# Altium PCB RFID主控板-MFC522.PcbDoc
Units mil, origin at the board's own origin, x right, y up, seen from the top; angles counter-clockwise.
Board outline 2155 x 1755 mil, 2 copper layers (Top Layer, Bottom Layer); 62 components, 46 nets, 180 pads, 118 vias.
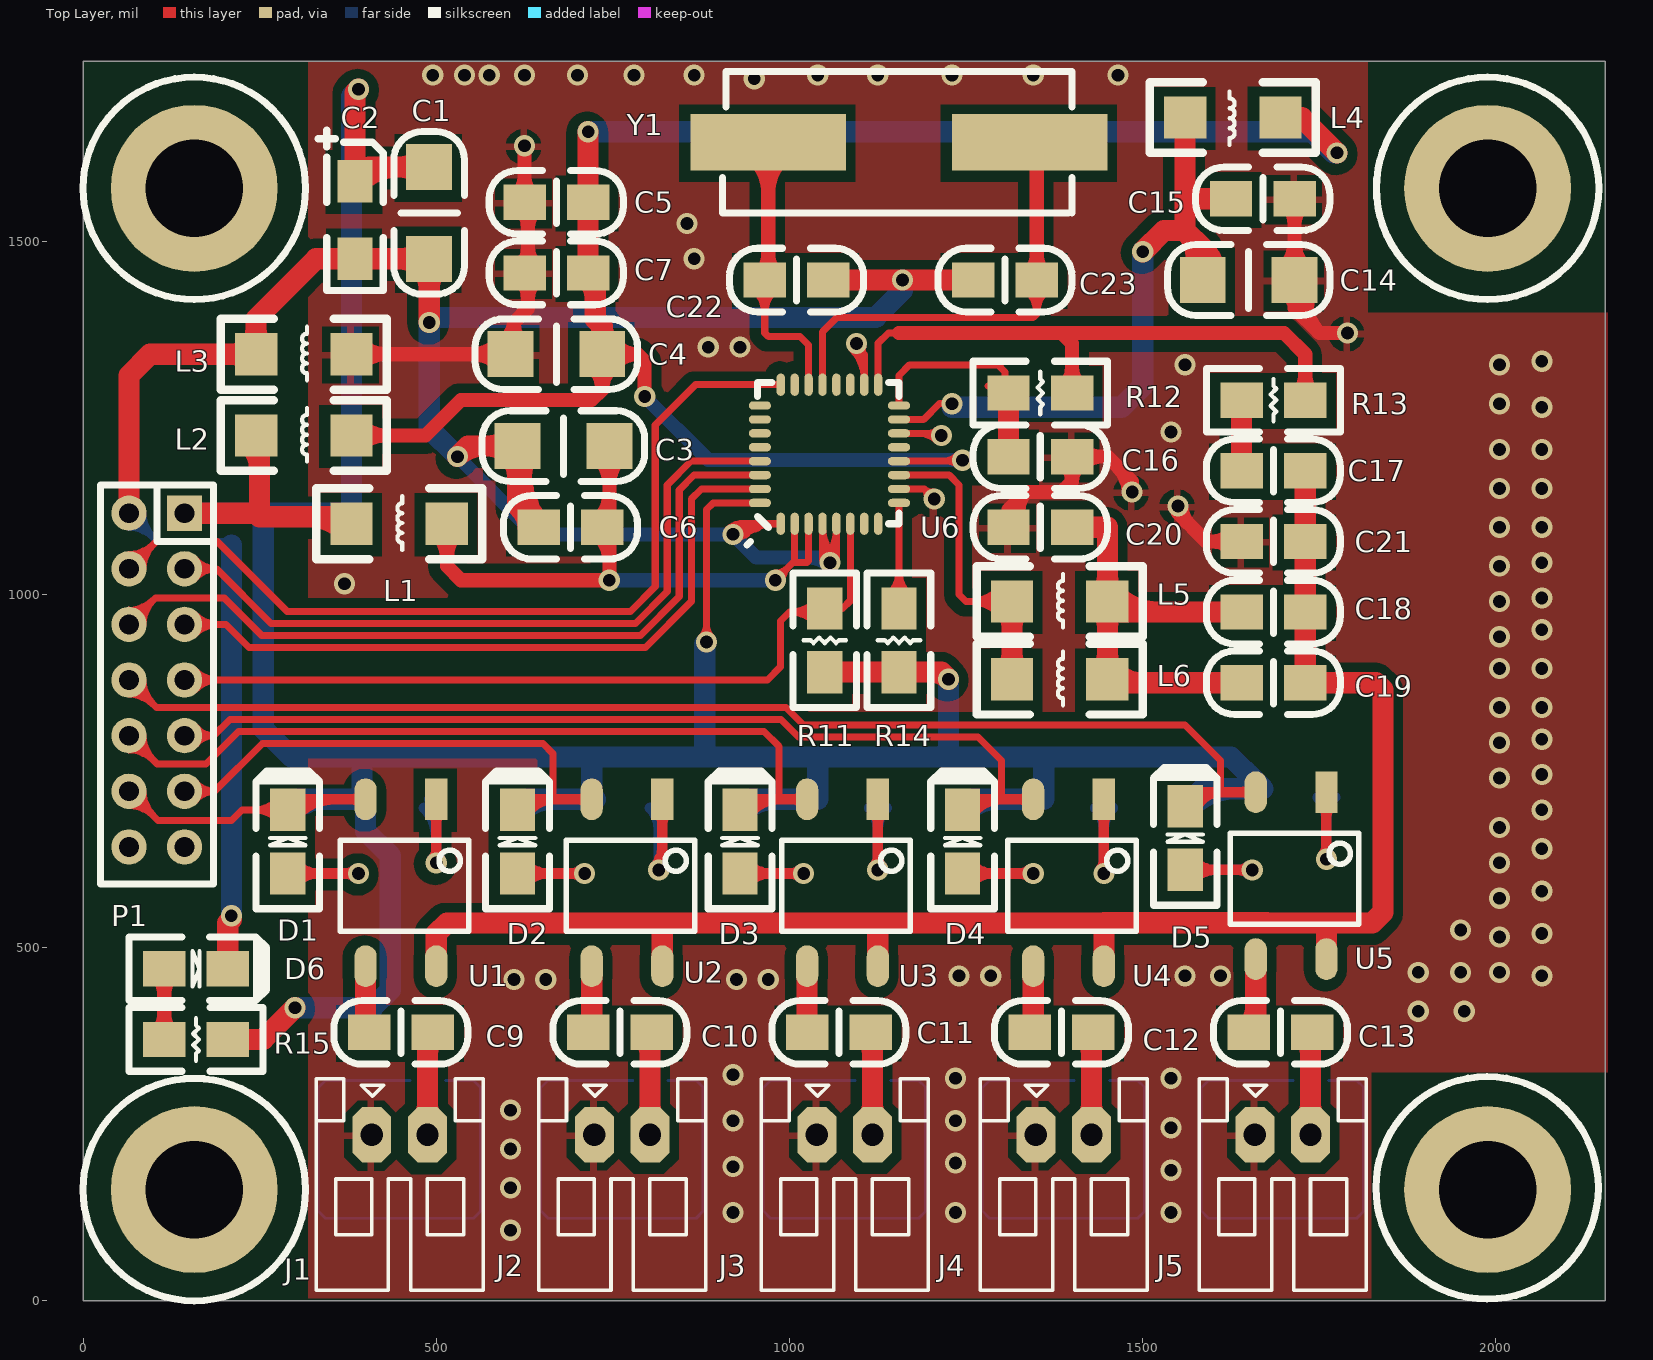
[diagram p0: Top Layer view]
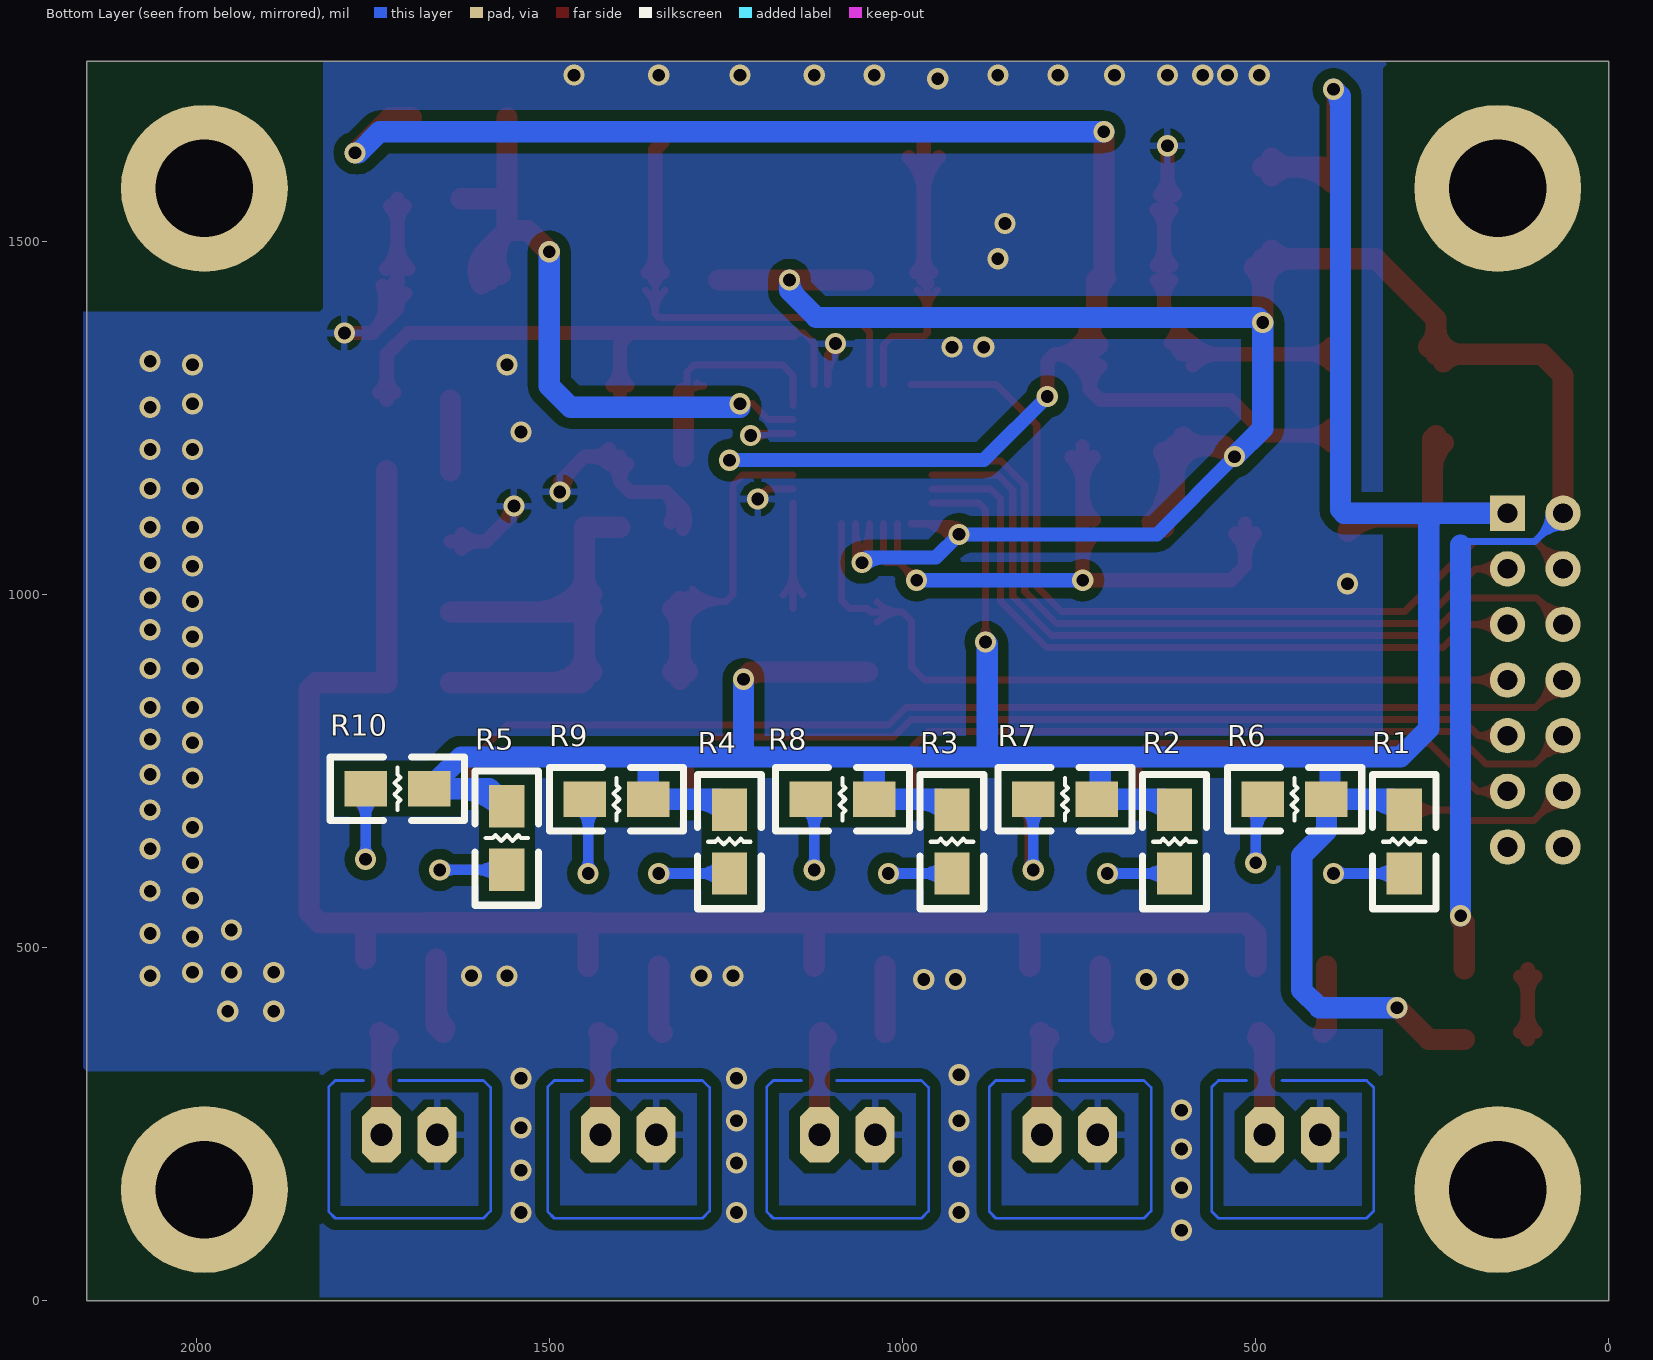
[diagram p1: Bottom Layer view, seen from below]
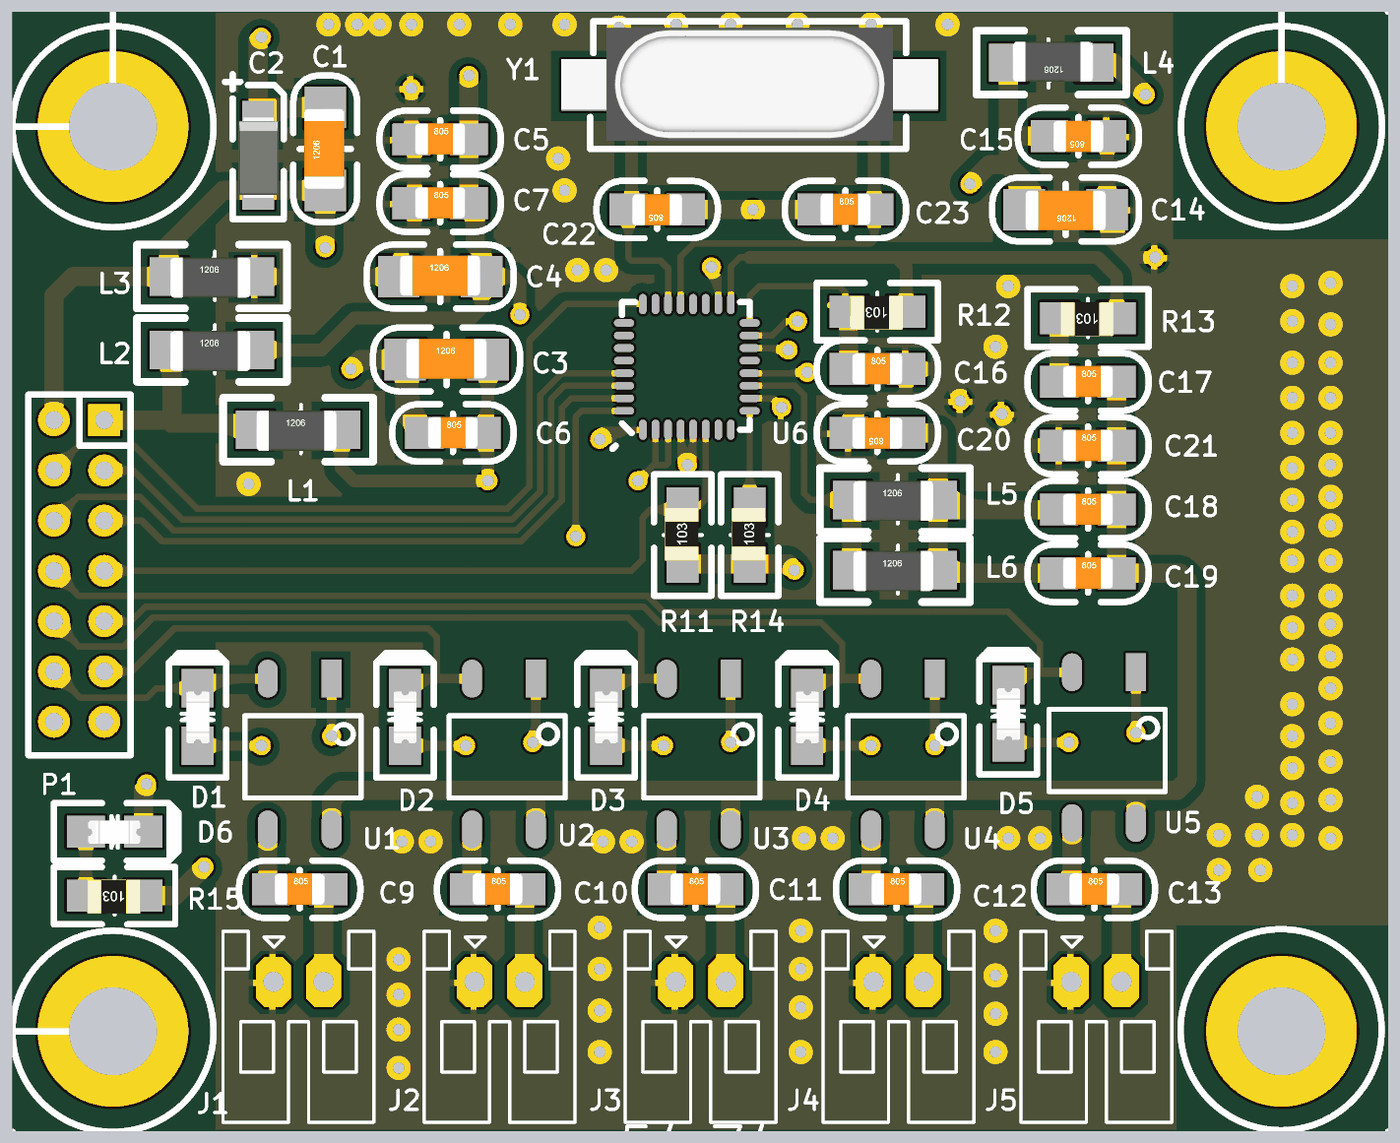
[diagram p2: 3D render of the assembled board from above, using the file's embedded part models]
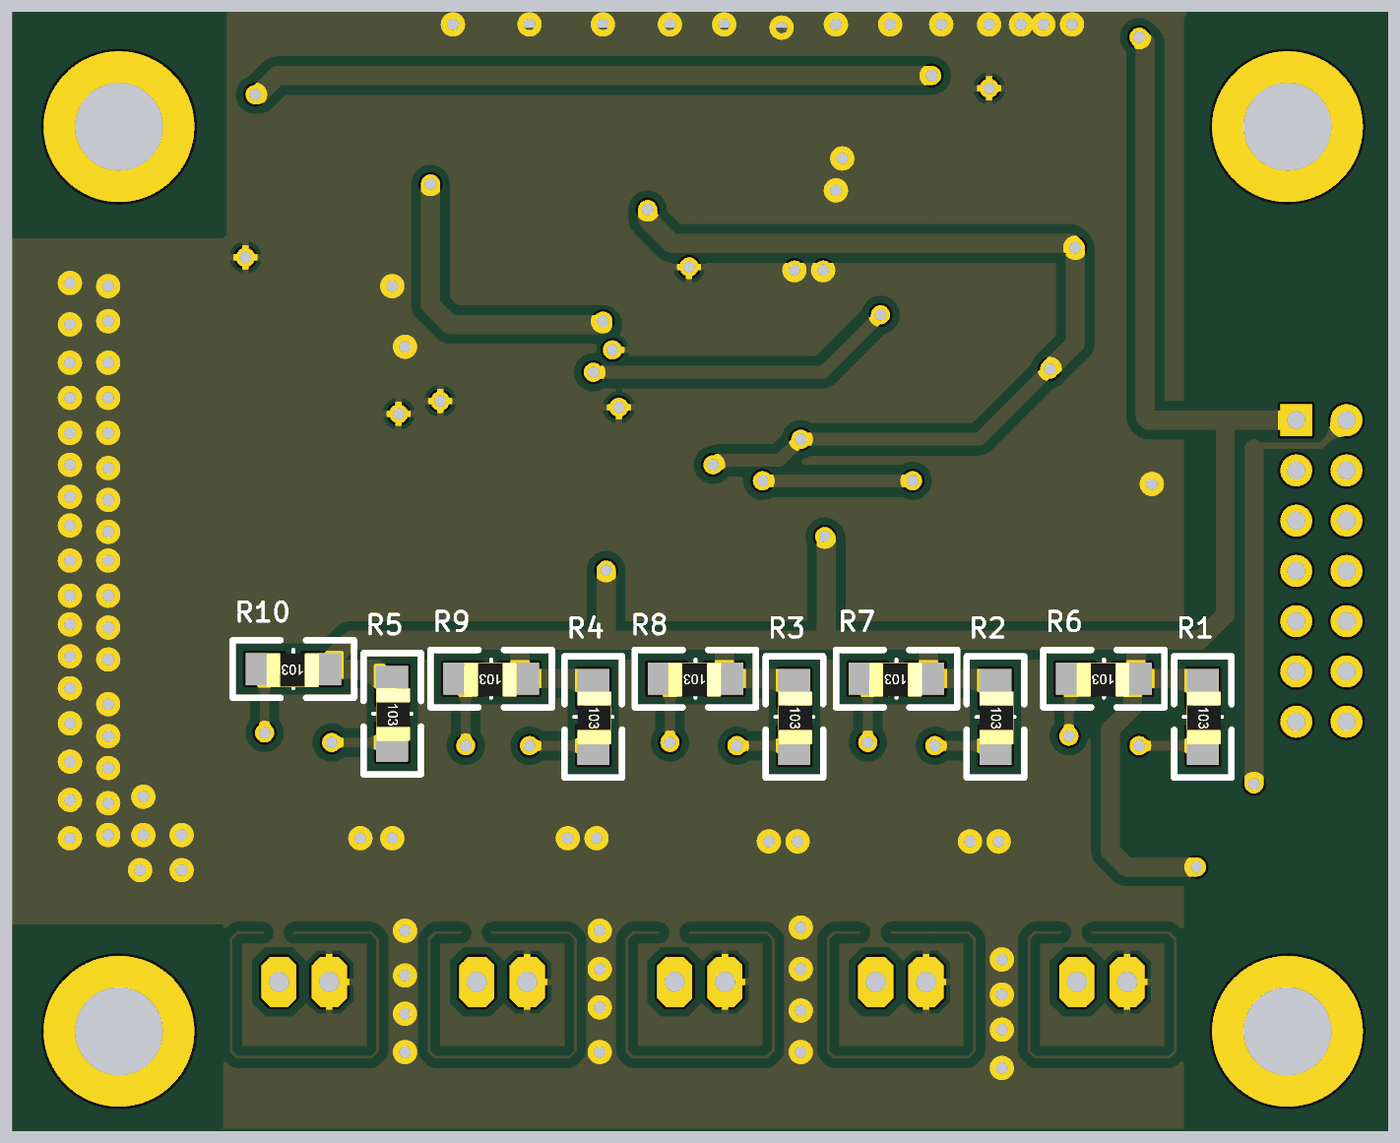
[diagram p3: 3D render of the assembled board from below, using the file's embedded part models]

## Layer stack, top to bottom
Top Layer: signal copper 1.4
Dielectric: dielectric 12.6, FR-4, Dk 4.8
Bottom Layer: signal copper 1.4

## Board outline
0,0 0,1755 2155,1755 2155,0 0,0

## Design rules (kind name [scope] priority, off if disabled: settings)
Clearance [All] p1: gap=7
HoleSize [All] p1 off: absolutevalues=TRUE maxlimit=100 minlimit=1 maxpercent=80.000 minpercent=20.000
MinimumSolderMaskSliver [All] p1: minsoldermaskwidth=7
PolygonConnect [All] p1: connectstyle=Relief reliefconductorwidth=10 reliefentries=4 polygonreliefangle="90 Angle" airgapwidth=10
RoutingVias [All] p1: holewidth=28 width=50 viastyle="Through Hole" minholewidth=28 minwidth=50 maxholewidth=28 maxwidth=50
SilkToSilkClearance [All] p1 off: silktosilkclearance=10
SilkToSolderMaskClearance [IsPad] p1 off: minsilkscreentomaskgap=7 clearancetoexposedcopper=TRUE
SolderMaskExpansion [All] p1: expansion=4
Width [All] p1: maxlimit=100 minlimit=1 preferedwidth=10
24 further rules are at their usual default settings.

## Components (designator, comment, footprint, x,y, rotation, side; value= is the part's Value field where it differs from the comment)
C1 "CC41-X7R-10V-4.7uF±10%" 1206C 490,1475 r90 top
C2 "CA45-16V-10uF±10%" 3216-A 385,1585 r270 top
C3 "CC41-X7R-10V-4.7uF±10%" 1206C 615,1210 r0 top
C4 "CC41-X7R-10V-4.7uF±10%" 1206C 605,1340 r0 top
C5 "CC41-X7R-50V-0.1uF±10%" 0805C 625,1555 r0 top
C6 "CC41-X7R-50V-0.1uF±10%" 0805C 645,1095 r0 top
C7 "CC41-NP0-50V-150pF±5%" 0805C 625,1455 r0 top
C9 "CC41-X7R-50V-68nF±10%" 0805C 405,380 r0 top
C10 "CC41-X7R-50V-68nF±10%" 0805C 715,380 r0 top
C11 "CC41-X7R-50V-68nF±10%" 0805C 1025,380 r0 top
C12 "CC41-X7R-50V-68nF±10%" 0805C 1340,380 r0 top
C13 "CC41-X7R-50V-68nF±10%" 0805C 1650,380 r0 top
C14 "CC41-X7R-10V-4.7uF±10%" 1206C 1715,1445 r180 top
C15 "CC41-X7R-50V-0.1uF±10%" 0805C 1715,1560 r180 top
C16 "CC41-X7R-50V-68nF±10%" 0805C 1310,1195 r0 top
C17 "CC41-X7R-50V-68nF±10%" 0805C 1640,1175 r0 top
C18 "CC41-NP0-50V-130pF±5%" 0805C 1640,975 r0 top
C19 "CC41-NP0-50V-130pF±5%" 0805C 1640,875 r0 top
C20 "CC41-NP0-50V-130pF±5%" 0805C 1400,1095 r180 top
C21 "CC41-NP0-50V-20pF±5%" 0805C 1640,1075 r0 top
C22 "CC41-NP0-50V-20pF±5%" 0805C 1055,1445 r180 top
C23 "CC41-NP0-50V-20pF±5%" 0805C 1260,1445 r0 top
D1 "17-21SYGC/S530-E2/TR8" 0805D 290,695 r270 top
D2 "17-21SYGC/S530-E2/TR8" 0805D 615,695 r270 top
D3 "17-21SYGC/S530-E2/TR8" 0805D 930,695 r270 top
D4 "17-21SYGC/S530-E2/TR8" 0805D 1245,695 r270 top
D5 "17-21SYGC/S530-E2/TR8" 0805D 1560,700 r270 top
D6 "17-21SYGC/S530-E2/TR8" 0805D 205,470 r180 top
J1 "A2001WR-2P" A2001WR-2P 330,15 r0 top
J2 "A2001WR-2P" A2001WR-2P 645,15 r0 top
J3 "A2001WR-2P" A2001WR-2P 960,15 r0 top
J4 "A2001WR-2P" A2001WR-2P 1270,15 r0 top
J5 "A2001WR-2P" A2001WR-2P 1580,15 r0 top
L1 "MLF3216A101KT000(TDK)-100uH" 1206L 380,1100 r0 top
L2 "HF50ACC321611(TDK)" 1206L 245,1225 r0 top
L3 "HF50ACC321611(TDK)" 1206L 245,1340 r0 top
L4 "MLF3216A101KT000(TDK)-100uH" 1206L 1695,1675 r180 top
L5 "LQM31PN1R0M00L(muRata)-1uH" 1206L 1315,990 r0 top
L6 "LQM31PN1R0M00L(muRata)-1uH" 1206L 1315,880 r0 top
P1 "Header 7X2H" IDC14-2.0-F 65,1115 r270 top
R1 "RS12-1/8W-1K±5%" 0805R 290,695 r270 bottom
R2 "RS12-1/8W-1K±5%" 0805R 615,695 r270 bottom
R3 "RS12-1/8W-1K±5%" 0805R 930,695 r270 bottom
R4 "RS12-1/8W-1K±5%" 0805R 1245,695 r270 bottom
R5 "RS12-1/8W-1K±5%" 0805R 1560,700 r270 bottom
R6 "RS12-1/8W-220Ω±5%" 0805R 400,710 r0 bottom
R7 "RS12-1/8W-220Ω±5%" 0805R 725,710 r0 bottom
R8 "RS12-1/8W-220Ω±5%" 0805R 1040,710 r0 bottom
R9 "RS12-1/8W-220Ω±5%" 0805R 1360,710 r0 bottom
R10 "RS12-1/8W-220Ω±5%" 0805R 1670,725 r0 bottom
R11 "RS12-1/8W-10KΩ±5%" 0805R 1050,890 r90 top
R12 "RS12-1/8W-2.7KΩ±1%" 0805R 1400,1285 r180 top
R13 "RS12-1/8W-820Ω±1%" 0805R 1730,1275 r180 top
R14 "RS12-1/8W-200Ω±1%" 0805R 1155,890 r90 top
R15 "RS12-1/8W-1K±5%" 0805R 205,370 r180 top
U1 "AQY221N2S(NAIS)" SOP-4 500,710 r270 top
U2 "AQY221N2S(NAIS)" SOP-4 820,710 r270 top locked
U3 "AQY221N2S(NAIS)" SOP-4 1125,710 r270 top
U4 "AQY221N2S(NAIS)" SOP-4 1445,710 r270 top
U5 "AQY221N2S(NAIS)" SOP-4 1760,720 r270 top
U6 "RC522" QFN-32 1155,1100 r90 top
Y1 "27.120MHz" HC-49/CMD 1340,1640 r180 top

## Footprints (in the part's own frame and the unit in brackets; to place one, negate y for a bottom-side part, rotate by r counter-clockwise, add the part's x,y. Pads: shape width x height; smd on the part's side, far side on the other; paste and mask are expansions set on the pad)
0805C [mil]
  rect 60x50 smd: 1(0,0) 2(90,0)
  silkscreen extent -50,-45 140,45, body extent 6,-24 84,25, height 31
0805D [mil]
  rect 60x50 smd: 1(90,0) 2(0,0)
  silkscreen extent -56,-45 140,46, body extent 5,-17 86,18, height 33
0805R [mil]
  rect 60x50 smd: 1(0,0) 2(90,0)
  silkscreen extent -50,-45 140,45, body extent 5,-25 88,28, height 24
1206C [mil]
  rect 65x65 smd: 1(0,0) 2(130,0)
  silkscreen extent -50,-50 180,50, body extent 2,-30 128,33, height 39
1206L [mil]
  rect 60x60 smd: 1(0,0) 2(135,0)
  silkscreen extent -50,-50 185,50, body extent 2,-33 128,30, height 39
3216-A [mil]
  rect 60x50 smd: 1(0,0) 2(110,0)
  silkscreen extent -72,-52 155,40, body extent -4,-31 122,32, height 63
A2001WR-2P [mm] "用于RFID天线的插座封装"
  oct 1.4x2 hole 0.8: 1(2,5.588) 2(4,5.588)
  Bottom Layer lines w0.1: 3.378,7.544 0.33,7.544 0.076,7.29 0.076,2.845 0.33,2.591 5.664,2.591 5.9,2.827 5.9,7.308 5.664,7.544 4.648,7.544
  silkscreen extent 0,0 6,7.6
HC-49/CMD [mil]
  rect 220x80 smd: 1(0,0) 2(370,0)
  silkscreen extent -60,-100 435,100, body extent -110,-90 480,87, height 99
IDC14-2.0-F [mm] "针型封装"
  rect 1.27x1.27 hole 0.711: 1(0,2)
  round 1.27 hole 0.711: 2(0,0) 3(2,2) 4(2,0) 5(4,2) 6(4,0) 7(6,2) 8(6,0) 9(8,2) 10(8,0) 11(10,2) 12(10,0) 13(12,2) 14(12,0)
  silkscreen extent -1.02,-1.02 13.33,3.05
QFN-32 [mm]
  oval 0.8x0.3 smd: 1(0,4.25) 2(0,3.75) 3(0,3.25) 4(0,2.75) 5(0,2.25) 6(0,1.75) 7(0,1.25) 8(0,0.75) 17(5,0.75) 18(5,1.25) 19(5,1.75) 20(5,2.25) 21(5,2.75) 22(5,3.25) 23(5,3.75) 24(5,4.25)
  oval 0.3x0.8 smd: 9(0.75,0) 10(1.25,0) 11(1.75,0) 12(2.25,0) 13(2.75,0) 14(3.25,0) 15(3.75,0) 16(4.25,0) 25(4.25,5) 26(3.75,5) 27(3.25,5) 28(2.75,5) 29(2.25,5) 30(1.75,5) 31(1.25,5) 32(0.75,5)
  silkscreen extent -0.76,0 5.08,5.46
SOP-4 [mm] "AQY221N2S"
  rect 1.5x0.8 smd: 1(0,0)
  oval 1.5x0.8 smd: 2(0,-2.54) 3(6,-2.54) 4(6,0)
  silkscreen extent 1.47,-3.45 4.75,1.17

## Part data
C1 C3 C4 C5 C6 C7 C9 C10 C11 C12 C13 C14 C15 C16 C17 C18 C19 C20 C21 C22 C23: library part CAP, "Capacitor"
C2: library part "Cap Pol1", "Polarized Capacitor (Radial)"
D1 D2 D3 D4 D5 D6: library part Diode, "Default Diode"
J1 J2 J3 J4 J5: library part CON2
L1 L2 L3 L4 L5 L6: library part Inductor, "Inductor"
P1: "Header, 7-Pin, Dual row, Right Angle"
R1 R2 R3 R4 R5 R6 R7 R8 R9 R10 R11 R12 R13 R14 R15: library part Res3, "Resistor"
U1 U2 U3 U4 U5: library part OpticalCoupler, "OpticalCoupler"
Y1: library part XTAL, "Crystal Oscillator"

## Free pads (board coordinates)
  round 236.22 hole 137.8: 0(157.48,157.48) 0(157.48,1574.8) 0(1988.19,157.48) 0(1988.19,1574.8)

## Via types
v1: diameter 30, hole 18, Top Layer to Bottom Layer, 118 vias

## Nets (pads, with @x,y where several pads share a name; then routed paths per layer and width w, separated by ;. In a path a pad name is that pad's centre, name@x,y a point inside that pad or via, vN(x,y) a via of type N, cw(c..) or ccw(c..) an arc to the next point about the centre after c; other vN are vias at no path point)
3.3VIN: C1.2 C2.1 L1.1 L2.1 P1.1 R1.1 R2.1 R3.1 R4.1 R5.1 R6.1 R7.1 R8.1 R9.1 R10.1 R11.1 R14.1 R15.1 U6.32 | length 6110.1
  Top Layer w10: v1(882.53,932.53) 882.53,1120 892.06,1129.53 U6.32 ; 882.53,956.67 cw(c858.39,956.67) 875.46,939.6 ccw(c858.39,956.67) 882.53,956.67 ; 882.53,956.67 ccw(c906.67,956.67) 889.6,939.6 cw(c906.67,956.67) 882.53,956.67
  Top Layer w30: P1.1 245,1115 250,1110 ; R15.1 255,370 v1(300,415) ; L2.1 250,1220 250,1110 ; 319.64,1110 cw(c319.64,1039.64) L1.1@369.39,1089.39 ; L1.1@370,1110 250,1110 ; v1(390,1715) 385,1710 C2.1 405,1605 C1.2 ; C2.1@392.07,1582.93 cw(c445.36,1529.64) 445.36,1605 ; R11.1 R14.1 1215,890 v1(1225,880) ccw(c1200.86,855.86) 1200.86,890 ; 447.75,1605 cw(c447.75,1562.75) 477.63,1592.63 ccw(c447.75,1562.75) 447.75,1605 ; 447.75,1605 ccw(c447.75,1647.25) 477.63,1617.37 cw(c447.75,1647.25) 447.75,1605 ; L2.1@234.39,1214.39 cw(c196.72,1176.72) 250,1176.72 ccw(c196.72,1176.72) L2.1@234.39,1214.39
  Bottom Layer w30: P1.1 245,1115 ; R1.1@296.66,707.46 ccw(c309.06,721.35) 318.37,705.23 ; v1(300,415) 410,415 435,440 435,630 400,665 R6.1 ; R1.1@305,710 R6.1 ; 380,1690.86 cw(c414.14,1690.86) v1(390,1715) 380,1705 380,1120 375,1115 245,1115 ; R2.1 630,710 R7.1 720,715 720,770 ; R2.1@622.07,692.93 cw(c663.28,651.72) 663.28,710 ; v1(882.53,932.53) 880,930 880,770 ; R3.1 945,710 R8.1 1040,770 ; R3.1@937.07,692.93 cw(c978.28,651.72) 978.28,710 ; v1(1225,880) 1225,780 1215,770 ; R4.1 1260,710 R9.1 1360,770 ; R4.1@1252.07,692.93 cw(c1293.28,651.72) 1293.28,710 ; R5.1 1585,725 R10.1 1625,770 1360,770 ; R5.1@1567.07,697.93 cw(c1632.43,632.57) 1632.43,725 ; 245,1115 255,1105 255,810 295,770 395,770 ; 395,770 720,770 ; 395,770 395,715 R6.1 ; 720,770 880,770 ; 880,770 1040,770 ; 1040,770 1215,770 ; 1215,770 1360,770 ; R1.1@297.07,692.93 cw(c338.28,651.72) 338.28,710 ccw(c338.28,651.72) R1.1@297.07,692.93 ; 1644.39,750.61 cw(c1618.79,725) 1655,725 ccw(c1618.79,725) 1644.39,750.61
/RST: P1.7 R11.2 U6.6 | length 1363.4
  Top Layer w10: P1.7 968.78,878.78 987.5,897.5 987.5,962.5 1000,975 1045,975 R11.2 1075,980 1086.1,991.1 U6.6 ; P1.7@157.88,864.64 cw(c192.02,830.5) 192.02,878.78 cw(c192.02,927.06) P1.7@157.88,892.92 ; 1001.72,975 cw(c1001.72,926.72) 1035.86,960.86 ccw(c1001.72,926.72) 1001.72,975 ; 1001.72,975 ccw(c1001.72,1023.28) 1035.86,989.14 cw(c1001.72,1023.28) 1001.72,975
AGND: C4.1 C5.1 C7.1 C14.1 C15.1 C16.2 C20.2 C21.1 J1.1 J2.1 J3.1 J4.1 J5.1 L3.2 U6.10 U6.14 U6.18 | length 3753.8
  Top Layer w10: v1@1087.93,1347.93 cw(c1044.81,1304.81) U6.18@1105.79,1304.81 ; v1@1095,1345 cw(c1095,1332.93) 1103.54,1341.46 ; v1(1095,1355) cw(c1068.96,1328.96) 1105.79,1328.96 ; v1@1100,1345 1105.79,1339.21 ; v1@1103.95,1350.53 ccw(c1112.72,1346.15) 1105.79,1339.21 ; U6.18 1105.79,1339.21 ; U6.10 1190.79,1149.21 ; U6.14 1202.95,1227.95 v1@1205,1230 ; 1183.73,1227.95 cw(c1183.73,1193.73) v1@1207.93,1217.93 ; v1@1195.09,1136.38 ccw(c1180.04,1138.47) 1190.79,1149.21 ; 1197.99,1227.95 ccw(c1197.99,1242.01) v1@1207.93,1232.07 ; v1@1203.62,1144.91 cw(c1201.53,1159.96) 1190.79,1149.21 ; v1(1205,1135) 1190.79,1149.21
  Top Layer w20: L3.2 C4.1 610,1345 610,1385 ; v1(625,1635) C5.1 630,1550 630,1405 610,1385 ; C20.2 1310,1120 1335,1145 ; 1474.19,1166.67 ccw(c1501.78,1174.06) v1@1487.5,1149.33 ; v1(1485,1145) 1485,1160 1450,1195 C16.2 1400,1160 ; v1@1547.5,1120.67 cw(c1533.22,1095.94) 1560.81,1103.33 ; v1(1550,1125) 1550,1115 1590,1075 C21.1 ; C14.1@1714.03,1442.7 cw(c1701.82,1413.75) 1733.04,1410.31 ; C15.1 C14.1 1715,1405 ; v1(1790,1370) 1750,1370 ; 428.28,1340 cw(c428.28,1388.28) 394.14,1354.14 ccw(c428.28,1388.28) 428.28,1340 ; 428.28,1340 ccw(c428.28,1291.72) 394.14,1325.86 cw(c428.28,1291.72) 428.28,1340 ; 550.68,1340 cw(c550.68,1285.68) 589.09,1324.09 ccw(c550.68,1285.68) 550.68,1340 ; 550.68,1340 ccw(c550.68,1394.32) 589.09,1355.91 cw(c550.68,1394.32) 550.68,1340 ; 610,1385 cw(c581.93,1385) 594.74,1360.02 ccw(c581.93,1385) 610,1385 ; 625,1591.21 cw(c588.79,1591.21) 614.39,1565.61 ccw(c588.79,1591.21) 625,1591.21 ; 625,1591.21 ccw(c661.21,1591.21) 635.61,1565.61 cw(c661.21,1591.21) 625,1591.21 ; 630,1418.79 cw(c666.21,1418.79) 640.61,1444.39 ccw(c666.21,1418.79) 630,1418.79 ; 630,1418.79 ccw(c593.79,1418.79) 619.39,1444.39 cw(c593.79,1418.79) 630,1418.79 ; 630,1491.21 cw(c593.79,1491.21) 619.39,1465.61 ccw(c593.79,1491.21) 630,1491.21 ; 630,1491.21 ccw(c666.21,1491.21) 640.61,1465.61 cw(c666.21,1491.21) 630,1491.21 ; 630,1518.79 cw(c666.21,1518.79) 640.61,1544.39 ccw(c666.21,1518.79) 630,1518.79 ; 630,1518.79 ccw(c593.79,1518.79) 619.39,1544.39 cw(c593.79,1518.79) 630,1518.79 ; 1335,1145 ccw(c1361.11,1118.88) 1328.32,1101.9 cw(c1361.11,1118.88) 1335,1145 ; 1335,1145 1385,1145 1400,1160 ; 1400,1160 cw(c1433.33,1160) 1410.34,1184.14 ccw(c1433.33,1160) 1400,1160 ; 1400,1160 ccw(c1366.67,1160) 1389.66,1184.14 cw(c1366.67,1160) 1400,1160 ; 1441.21,1195 cw(c1441.21,1231.21) 1415.61,1205.61 ccw(c1441.21,1231.21) 1441.21,1195 ; 1441.21,1195 ccw(c1441.21,1158.79) 1415.61,1184.39 cw(c1441.21,1158.79) 1441.21,1195 ; 1598.79,1075 cw(c1598.79,1038.79) 1624.39,1064.39 ccw(c1598.79,1038.79) 1598.79,1075 ; 1598.79,1075 ccw(c1598.79,1111.21) 1624.39,1085.61 cw(c1598.79,1111.21) 1598.79,1075 ; 1715,1405 cw(c1739.3,1405) 1726.68,1425.77 ccw(c1739.3,1405) 1715,1405 ; 1715,1405 ccw(c1690.7,1405) 1703.32,1425.77 cw(c1690.7,1405) 1715,1405 ; 1715,1405 1750,1370 ; 1715,1499.32 cw(c1660.68,1499.32) 1699.09,1460.91 ccw(c1660.68,1499.32) 1715,1499.32 ; 1715,1499.32 ccw(c1769.32,1499.32) 1730.91,1460.91 cw(c1769.32,1499.32) 1715,1499.32 ; 1715,1523.79 cw(c1751.21,1523.79) 1725.61,1549.39 ccw(c1751.21,1523.79) 1715,1523.79 ; 1715,1523.79 ccw(c1678.79,1523.79) 1704.39,1549.39 cw(c1678.79,1523.79) 1715,1523.79 ; 1750,1370 cw(c1794.16,1414.16) 1735.97,1436.83 ccw(c1794.16,1414.16) 1750,1370 ; 610,1382.25 ccw(c647.25,1382.25) 620.91,1355.91 cw(c647.25,1382.25) 610,1382.25 ; C20.2@1310.56,1092.7 cw(c1335.65,1105.69) 1315.67,1125.67 ccw(c1335.65,1105.69) C20.2@1310.56,1092.7 ; 1465.86,1179.14 cw(c1431.72,1145) 1480,1145 ccw(c1431.72,1145) 1465.86,1179.14 ; v1@1555,1125 ccw(c1591.21,1125) 1565.61,1099.39 cw(c1591.21,1125) v1@1555,1125 ; C14.1@1717.33,1444.09 ccw(c1762.98,1426.31) 1728.34,1391.66 cw(c1762.98,1426.31) C14.1@1717.33,1444.09
  other v1: 605,100 920,125 1235,125 1540,125 605,160 1540,185 920,190 1235,195 605,215 1540,245 920,255 1235,255 605,270 1235,315 1540,315 920,320 1890,410 1955,410 610,455 655,455 925,455 970,455 1240,460 1285,460 1560,460 1610,460 2065,460 1890,465 1950,465 2005,465 2005,515 2065,520 1950,525 2005,570 2065,580 2005,620 2065,640 2005,670 2065,695 2005,740 2065,745 2005,790 2065,795 2005,840 2065,840 2005,895 2065,895 2005,940 2065,950 2005,990 2065,995 370,1015 2005,1040 2065,1045 2005,1095 2065,1095 2005,1150 2065,1150 2005,1205 2065,1205 1215,1225 1540,1230 2065,1265 2005,1270 1560,1325 2005,1325 2065,1330 885,1350 930,1350 865,1475 855,1525 950,1730 495,1735 540,1735 575,1735 625,1735 700,1735 780,1735 865,1735 1040,1735 1125,1735 1230,1735 1345,1735 1465,1735
AVDD: C14.2 C15.2 L4.2 U6.15 | length 1185
  Top Layer w10: U6.15 1190,1247.64 1212.36,1270 v1(1230,1270)
  Top Layer w30: v1(1500,1485) 1530,1515 1560,1515 ; L4.2 1560,1560 ; C14.2@1569.49,1453.1 ccw(c1522.59,1477.59) 1560,1515 ; C14.2 1585,1490 1560,1515 ; 1588.89,1486.11 cw(c1560.55,1457.77) C14.2@1596.08,1439.21 ; C15.2 1560,1560 ; 1560,1515 1560,1560 ; 1585,1487.25 cw(c1542.75,1487.25) 1572.63,1457.37 ccw(c1542.75,1487.25) 1585,1487.25 ; 1585,1487.25 ccw(c1627.25,1487.25) 1597.37,1457.37 cw(c1627.25,1487.25) 1585,1487.25
  Bottom Layer w30: v1@1230,1265 1470,1265 1500,1295 v1(1500,1485)
DVDD: C3.2 C6.2 L1.2 U6.2 U6.3 | length 1452.9
  Top Layer w10: 992.6,1033.38 ccw(c997.12,1016.49) v1(980,1020) ; 993.38,1032.6 cw(c976.49,1037.12) v1(980,1020) ; U6.2 1007.36,1047.36 1005,1045 ; U6.3 1027.05,1047.05 1025,1045 1005,1045 ; v1(980,1020) 1005,1045 ; 997.07,1037.07 cw(c980,1054.14) 980,1030 ccw(c980,1054.14) 997.07,1037.07 ; 997.07,1037.07 ccw(c1014.14,1020) 990,1020 cw(c1014.14,1020) 997.07,1037.07
  Top Layer w20: L1.2 515,1040 535,1020 v1(745,1020) C3.2 ; C6.2@729.39,1084.39 cw(c691.72,1046.72) 745,1046.72 ; 515,1051.72 cw(c563.28,1051.72) 529.14,1085.86 ccw(c563.28,1051.72) 515,1051.72 ; 515,1051.72 ccw(c466.72,1051.72) 500.86,1085.86 cw(c466.72,1051.72) 515,1051.72 ; 745,1155.68 cw(c799.32,1155.68) 760.91,1194.09 ccw(c799.32,1155.68) 745,1155.68 ; 745,1155.68 ccw(c690.68,1155.68) 729.09,1194.09 cw(c690.68,1155.68) 745,1155.68 ; C6.2@729.39,1105.61 ccw(c691.72,1143.28) 745,1143.28 cw(c691.72,1143.28) C6.2@729.39,1105.61
  Bottom Layer w20: v1(745,1020) v1(980,1020)
G1: D1.2 P1.12 U1.2 | length 899.4
  Top Layer w10: 90.2,694.55 cw(c99.24,728.31) P1.12 ; 91.75,696.1 ccw(c57.99,687.05) P1.12 ; D1.2 225,695 210,680 106.3,680 P1.12 ; 99.14,687.16 cw(c133.28,721.3) 85,721.3 ccw(c133.28,721.3) 99.14,687.16 ; 99.14,687.16 ccw(c65,653.01) 65,701.3 cw(c65,653.01) 99.14,687.16 ; 241.72,695 cw(c241.72,646.72) 275.86,680.86 ccw(c241.72,646.72) 241.72,695 ; 241.72,695 ccw(c241.72,743.28) 275.86,709.14 cw(c241.72,743.28) 241.72,695
  Top Layer w15: D1.2 305,710 U1.2 ; D1.2@291.77,698.23 cw(c320.18,669.82) 320.18,710 ; D1.2@302.37,687.63 cw(c356.39,633.61) 356.39,710 ; 380.09,710 cw(c380.09,690.09) 394.17,704.17 ccw(c380.09,690.09) 380.09,710 ; 380.09,710 ccw(c380.09,729.91) 394.17,715.83 cw(c380.09,729.91) 380.09,710
G2: D2.2 P1.11 U2.2 | length 1001.7
  Top Layer w10: P1.11 186.3,721.3 ; 665,710 665,775 651,789 254,789 186.3,721.3 ; 186.3,721.3 cw(c186.3,756.58) 159.14,734.06 ccw(c186.3,756.58) 186.3,721.3 ; 186.3,721.3 ccw(c186.3,686.02) 159.14,708.54 cw(c186.3,686.02) 186.3,721.3
  Top Layer w15: D2.2 630,710 665,710 ; U2.2 665,710 ; 665,710 ccw(c665,668.3) 629.78,690.63 cw(c665,668.3) 665,710 ; 700.09,710 cw(c700.09,690.09) 714.17,704.17 ccw(c700.09,690.09) 700.09,710 ; 700.09,710 ccw(c700.09,729.91) 714.17,715.83 cw(c700.09,729.91) 700.09,710
G3: D3.2 P1.10 U3.2 | length 1580.5
  Top Layer w10: 90.2,773.29 cw(c99.24,807.05) P1.10 ; 91.75,774.84 ccw(c57.99,765.79) P1.10 ; D3.2 D3.2@945,710 ; 985,710 985,785 964,806 220,806 174,760 105.04,760 P1.10 ; 99.14,765.9 cw(c133.28,800.04) 85,800.04 ccw(c133.28,800.04) 99.14,765.9 ; 99.14,765.9 ccw(c65,731.76) 65,780.04 cw(c65,731.76) 99.14,765.9
  Top Layer w15: D3.2@945,710 985,710 ; U3.2 985,710 ; 985,710 ccw(c985,658.75) 944,689.5 cw(c985,658.75) 985,710 ; 1005.09,710 cw(c1005.09,690.09) 1019.17,704.17 ccw(c1005.09,690.09) 1005.09,710 ; 1005.09,710 ccw(c1005.09,729.91) 1019.17,715.83 cw(c1005.09,729.91) 1005.09,710 ; D3.2@932,698.5 cw(c955,681.25) 955,710 ccw(c955,681.25) D3.2@932,698.5
G4: D4.2 P1.9 U4.2 | length 1620.8
  Top Layer w10: P1.9 185.04,800.04 ; P1.9@159.43,787.64 cw(c185.04,767.4) 185.04,800.04 ; P1.9@159.43,812.44 ccw(c185.04,832.68) 185.04,800.04 ; D4.2 D4.2@1260,710 ; 1300,710 1300,765 1267,798 1012.96,798 987.96,823 208,823 185.04,800.04
  Top Layer w15: D4.2@1260,710 1300,710 ; U4.2 1300,710 ; 1300,710 ccw(c1300,658.75) 1259,689.5 cw(c1300,658.75) 1300,710 ; 1325.09,710 cw(c1325.09,690.09) 1339.17,704.17 ccw(c1325.09,690.09) 1325.09,710 ; 1325.09,710 ccw(c1325.09,729.91) 1339.17,715.83 cw(c1325.09,729.91) 1325.09,710 ; D4.2@1247,698.5 cw(c1270,681.25) 1270,710 ccw(c1270,681.25) D4.2@1247,698.5
G5: D5.2 P1.8 U5.2 | length 2185
  Top Layer w10: 90.2,852.03 cw(c99.24,885.79) P1.8 ; 91.75,853.58 ccw(c57.99,844.53) P1.8 ; D5.2 D5.2@1580,720 ; 1610,720 1610,765 1560,815 1020,815 995,840 103.78,840 P1.8 ; 99.14,844.64 cw(c133.28,878.78) 85,878.78 ccw(c133.28,878.78) 99.14,844.64 ; 99.14,844.64 ccw(c65,810.5) 65,858.78 cw(c65,810.5) 99.14,844.64
  Top Layer w15: D5.2@1580,720 1610,720 ; U5.2 1610,720 ; 1610,720 ccw(c1610,682.79) 1575.99,697.9 cw(c1610,682.79) 1610,720 ; 1640.09,720 cw(c1640.09,700.09) 1654.17,714.17 ccw(c1640.09,700.09) 1640.09,720 ; 1640.09,720 ccw(c1640.09,739.91) 1654.17,725.83 cw(c1640.09,739.91) 1640.09,720 ; D5.2@1562.28,703.99 cw(c1586.92,693.04) 1586.92,720 ccw(c1586.92,693.04) D5.2@1562.28,703.99
GND: C1.1 C2.2 C3.1 C6.1 C22.1 C23.1 D6.2 L3.1 P1.2 U6.1 U6.4 U6.5 | length 5729.7
  Top Layer w10: v1@922.59,1094.66 ccw(c928.84,1117.98) 940.91,1097.07 ccw(c952.98,1076.16) v1@929.66,1082.41 ; v1@924.58,1093.89 ccw(c939.61,1123.07) 956.02,1094.64 ; v1@925,1095 930,1100 ; 940.15,1085.48 cw(c929.64,1103.7) v1(920,1085) ; U6.1 930,1100 ; U6.4 1047,1099.73 1047,1048 1050,1045 v1(1057.5,1045) ; 1047,1070.35 ccw(c1082.85,1070.35) v1(1057.5,1045) ; U6.4@1047,1094.49 ccw(c1106.99,1094.49) v1@1064.57,1052.07 ; v1@1050.43,1052.07 ccw(c1011.83,1090.67) U6.5@1066.42,1090.67 ; 1066.42,1066.53 cw(c1035.97,1066.53) v1(1057.5,1045) ; U6.5 1066.42,1046.42 1065,1045 v1(1057.5,1045) ; v1(920,1085) cw(c956.21,1048.79) 956.21,1100 ccw(c956.21,1048.79) v1(920,1085) ; 930,1100 ccw(c935.88,1094.12) 928.67,1089.98 cw(c935.88,1094.12) 930,1100 ; v1@912.93,1092.07 cw(c932.07,1072.93) 932.07,1100 ccw(c932.07,1072.93) v1@912.93,1092.07 ; v1@920,1095 ccw(c920,1107.07) 928.54,1098.54 cw(c920,1107.07) v1@920,1095 ; v1@927.07,1077.93 cw(c980.36,1024.64) 980.36,1100 ccw(c980.36,1024.64) v1@927.07,1077.93
  Top Layer w30: P1.2 65,1310 95,1340 L3.1 245,1390 330,1475 C2.2 C1.1 v1(490,1385) ; D6.2 205,535 v1@210,540 ; 566.21,1210 ccw(c566.21,1158.79) v1(530,1195) 545,1210 C3.1 615,1125 C6.1 ; 619.39,1120.61 cw(c593.79,1095) C6.1@630,1095 ; 624.63,1140.93 cw(c575.17,1112.37) C6.1@630.34,1097.59 ; C22.1 v1(1160,1445) C23.1 ; 208.79,1340 cw(c208.79,1303.79) 234.39,1329.39 ccw(c208.79,1303.79) 208.79,1340 ; 208.79,1340 ccw(c208.79,1376.21) L3.1@234.39,1350.61 ; 208.79,1340 ccw(c208.79,1376.21) L3.1@234.39,1350.61 ; L3.1@234.39,1350.61 ccw(c208.79,1376.21) 245,1376.21 ; L3.1@234.39,1350.61 ccw(c208.79,1376.21) 245,1376.21 ; 245,1376.21 ccw(c281.21,1376.21) 255.61,1350.61 cw(c281.21,1376.21) 245,1376.21 ; 447.75,1475 cw(c447.75,1432.75) C1.1@477.63,1462.63 ; 447.75,1475 ccw(c447.75,1517.25) 477.63,1487.37 cw(c447.75,1517.25) 447.75,1475 ; 447.75,1475 cw(c447.75,1432.75) C1.1@477.63,1462.63 ; C1.1@477.63,1462.63 cw(c447.75,1432.75) 490,1432.75 ; C1.1@477.63,1462.63 cw(c447.75,1432.75) 490,1432.75 ; 490,1432.75 cw(c532.25,1432.75) 502.37,1462.63 ccw(c532.25,1432.75) 490,1432.75 ; 572.75,1210 cw(c572.75,1167.75) C3.1@602.63,1197.63 ; 572.75,1210 ccw(c572.75,1252.25) 602.63,1222.37 cw(c572.75,1252.25) 572.75,1210 ; 572.75,1210 cw(c572.75,1167.75) C3.1@602.63,1197.63 ; C3.1@602.63,1197.63 cw(c572.75,1167.75) 615,1167.75 ; C3.1@602.63,1197.63 cw(c572.75,1167.75) 615,1167.75 ; 615,1167.75 cw(c657.25,1167.75) 627.37,1197.63 ccw(c657.25,1167.75) 615,1167.75 ; 623.24,1148.74 cw(c690.09,1166.65) C3.1@630.16,1201.25 ; 623.24,1148.74 cw(c690.09,1166.65) C3.1@630.16,1201.25 ; 623.24,1148.74 cw(c690.09,1166.65) C3.1@630.16,1201.25 ; C3.1@615,1179.5 ccw(c724.5,1179.5) 647.07,1102.07 cw(c724.5,1179.5) C3.1@615,1179.5
  Bottom Layer w10: 90.2,1088.25 cw(c99.24,1122.01) P1.2 ; 91.75,1089.8 ccw(c57.99,1080.76) P1.2 ; 210,1070 205,1075 105,1075 P1.2 ; 99.14,1080.86 cw(c133.28,1115) 85,1115 ccw(c133.28,1115) 99.14,1080.86 ; 99.14,1080.86 ccw(c65,1046.72) 65,1095 cw(c65,1046.72) 99.14,1080.86
  Bottom Layer w20: v1(530,1195) 640,1085 v1(920,1085) 953,1052 1050.5,1052 v1(1057.5,1045) ; 1028.53,1052 cw(c1028.53,1016.03) v1@1053.96,1041.46
  Bottom Layer w30: v1(210,545) 210,1070 ; v1(530,1195) 490,1235 v1(490,1385) ; 1149.39,1419.39 ccw(c1123.79,1445) v1(1160,1445) 1160,1430 1122,1392 497,1392 v1(490,1385) ; v1(490,1385) cw(c506.9,1368.1) 506.9,1392 ccw(c506.9,1368.1) v1(490,1385)
MISO: P1.5 U6.31 | length 1081.6
  Top Layer w10: P1.5 202.48,957.52 235,925 796.12,925 861,989.88 861,1135 875.21,1149.21 U6.31 ; P1.5@157.88,943.38 cw(c192.02,909.24) 192.02,957.52 cw(c192.02,1005.8) P1.5@157.88,971.66
MOSI: P1.6 U6.30 | length 1342.2
  Top Layer w10: 90.2,984.27 ccw(c99.24,950.51) P1.6 ; 91.75,982.72 cw(c57.99,991.76) P1.6 ; U6.30 864.94,1168.9 844,1147.96 844,996.92 789.08,942 253,942 200,995 102.48,995 P1.6 ; 99.14,991.66 cw(c65,1025.8) 65,977.52 ccw(c65,1025.8) 99.14,991.66 ; 99.14,991.66 ccw(c133.28,957.52) 85,957.52 cw(c133.28,957.52) 99.14,991.66
NetC9_1: C9.1 U1.3 | length 95.9
  Top Layer w30: U1.3 400,385 C9.1
NetC9_2: C9.2 J1.2 | length 294.8
  Top Layer w30: J1.2 487.48,372.48 C9.2 ; 487.48,277.13 cw(c457.16,277.13) 478.6,255.69 ccw(c457.16,277.13) 487.48,277.13 ; 487.48,277.13 ccw(c517.8,277.13) 496.36,255.69 cw(c517.8,277.13) 487.48,277.13 ; 487.48,349.77 cw(c520.23,349.77) 497.07,372.93 ccw(c520.23,349.77) 487.48,349.77
NetC10_1: C10.1 U2.3 | length 95.9
  Top Layer w30: C10.1 720,385 U2.3
NetC10_2: C10.2 J2.2 | length 292.5
  Top Layer w30: J2.2 802.48,377.48 C10.2 ; 802.48,277.13 cw(c772.16,277.13) 793.6,255.69 ccw(c772.16,277.13) 802.48,277.13 ; 802.48,277.13 ccw(c832.8,277.13) 811.36,255.69 cw(c832.8,277.13) 802.48,277.13 ; C10.2@792.93,372.93 cw(c769.87,349.87) 802.48,349.87 ccw(c769.87,349.87) C10.2@792.93,372.93
NetC11_1: C11.1 U3.3 | length 93.8
  Top Layer w30: C11.1 U3.3
NetC11_2: C11.2 J3.2 | length 292.5
  Top Layer w30: C11.2 1117.48,377.52 J3.2 ; 1117.48,277.13 cw(c1087.16,277.13) 1108.6,255.69 ccw(c1087.16,277.13) 1117.48,277.13 ; 1117.48,277.13 ccw(c1147.8,277.13) 1126.36,255.69 cw(c1147.8,277.13) 1117.48,277.13 ; C11.2@1107.93,372.93 cw(c1084.87,349.87) 1117.48,349.87 ccw(c1084.87,349.87) C11.2@1107.93,372.93
NetC12_1: C12.1 U4.3 | length 95.9
  Top Layer w30: C12.1 1345,385 U4.3
NetC12_2: C12.2 J4.2 | length 292.5
  Top Layer w30: J4.2 1427.48,377.48 C12.2 ; 1427.48,277.13 cw(c1397.16,277.13) 1418.6,255.69 ccw(c1397.16,277.13) 1427.48,277.13 ; 1427.48,277.13 ccw(c1457.8,277.13) 1436.36,255.69 cw(c1457.8,277.13) 1427.48,277.13 ; C12.2@1417.93,372.93 cw(c1394.87,349.87) 1427.48,349.87 ccw(c1394.87,349.87) C12.2@1417.93,372.93
NetC13_1: C13.1 U5.3 | length 172.7
  Top Layer w30: C13.1 1660,390 U5.3 ; C13.1@1647.93,387.07 ccw(c1618.79,416.21) 1660,416.21 cw(c1618.79,416.21) C13.1@1647.93,387.07
NetC13_2: C13.2 J5.2 | length 292.5
  Top Layer w30: J5.2 1737.48,377.48 C13.2 ; 1737.48,277.13 cw(c1707.16,277.13) 1728.6,255.69 ccw(c1707.16,277.13) 1737.48,277.13 ; 1737.48,277.13 ccw(c1767.8,277.13) 1746.36,255.69 cw(c1767.8,277.13) 1737.48,277.13 ; C13.2@1727.93,372.93 cw(c1704.87,349.87) 1737.48,349.87 ccw(c1704.87,349.87) C13.2@1727.93,372.93
NetC17_1: C17.1 R13.2 | length 100
  Top Layer w30: C17.1 R13.2
NetC18_1: C18.1 C19.1 C20.1 L5.2 L6.2 | length 1146.9
  Top Layer w30: C20.1 1450,1095 L5.2 ; 1522.43,975 cw(c1522.43,1062.43) L5.2@1460.61,1000.61 ; C19.1 1455,875 L6.2 L5.2 ; C18.1 1465,975 L5.2 ; 1450,916.21 cw(c1413.79,916.21) 1439.39,890.61 ccw(c1413.79,916.21) 1450,916.21 ; 1450,916.21 ccw(c1486.21,916.21) L6.2@1460.61,890.61 ; 1450,916.21 ccw(c1486.21,916.21) L6.2@1460.61,890.61 ; 1450,953.79 cw(c1486.21,953.79) 1460.61,979.39 ccw(c1486.21,953.79) 1450,953.79 ; 1450,953.79 ccw(c1413.79,953.79) 1439.39,979.39 cw(c1413.79,953.79) 1450,953.79 ; 1450,1026.21 cw(c1413.79,1026.21) 1439.39,1000.61 ccw(c1413.79,1026.21) 1450,1026.21 ; 1450,1026.21 ccw(c1486.21,1026.21) L5.2@1460.61,1000.61 ; 1450,1026.21 ccw(c1486.21,1026.21) L5.2@1460.61,1000.61 ; L6.2@1460.61,890.61 ccw(c1498.28,928.28) 1498.28,875 cw(c1498.28,928.28) L6.2@1460.61,890.61
NetC22_2: C22.2 U6.22 Y1.2 | length 700.7
  Top Layer w10: C22.2@950.86,1430.86 cw(c916.72,1396.72) 965,1396.72 cw(c1013.28,1396.72) C22.2@979.14,1430.86 ; C22.2@965,1440 965,1370 970,1365 1015,1365 1027.05,1352.95 U6.22
  Top Layer w20: Y1.2@948.79,1618.79 cw(c897.57,1567.57) 970,1567.57 cw(c1042.43,1567.57) Y1.2@991.21,1618.79 ; C22.2@965,1440 970,1445 Y1.2 ; 970,1481.21 cw(c933.79,1481.21) 959.39,1455.61 ccw(c933.79,1481.21) 970,1481.21 ; 970,1481.21 ccw(c1006.21,1481.21) 980.61,1455.61 cw(c1006.21,1481.21) 970,1481.21
NetC23_2: C23.2 U6.21 Y1.1 | length 824.7
  Top Layer w10: U6.21 1046.73,1371.73 1067,1392 1345,1392 1350,1397 ; C23.2@1335.92,1430.8 cw(c1302.41,1397) 1350,1397 ; C23.2 1350,1397 ; C23.2@1364.08,1430.8 ccw(c1397.59,1397) 1350,1397
  Top Layer w20: Y1.1 1350,1630 C23.2 ; 1350,1481.21 cw(c1313.79,1481.21) 1339.39,1455.61 ccw(c1313.79,1481.21) 1350,1481.21 ; 1350,1481.21 ccw(c1386.21,1481.21) 1360.61,1455.61 cw(c1386.21,1481.21) 1350,1481.21
NetD1_1: D1.1 R1.2 | length 579.2
  Top Layer w15: D1.1 v1(390,605) ; 332.25,605 cw(c332.25,647.25) 302.37,617.37 ccw(c332.25,647.25) 332.25,605 ; 332.25,605 ccw(c332.25,562.75) 302.37,592.63 cw(c332.25,562.75) 332.25,605 ; 371.89,605 cw(c371.89,586.89) 384.7,599.7 ccw(c371.89,586.89) 371.89,605 ; 371.89,605 ccw(c371.89,623.11) 384.7,610.3 cw(c371.89,623.11) 371.89,605
  Bottom Layer w15: R1.2 v1(390,605) ; 332.25,605 cw(c332.25,647.25) 302.37,617.37 ccw(c332.25,647.25) 332.25,605 ; 332.25,605 ccw(c332.25,562.75) 302.37,592.63 cw(c332.25,562.75) 332.25,605 ; 371.89,605 cw(c371.89,586.89) 384.7,599.7 ccw(c371.89,586.89) 371.89,605 ; 371.89,605 ccw(c371.89,623.11) 384.7,610.3 cw(c371.89,623.11) 371.89,605
NetD2_1: D2.1 R2.2 | length 569.2
  Top Layer w15: D2.1 v1(710,605) ; 657.25,605 cw(c657.25,647.25) 627.37,617.37 ccw(c657.25,647.25) 657.25,605 ; 657.25,605 ccw(c657.25,562.75) 627.37,592.63 cw(c657.25,562.75) 657.25,605 ; 691.89,605 cw(c691.89,586.89) 704.7,599.7 ccw(c691.89,586.89) 691.89,605 ; 691.89,605 ccw(c691.89,623.11) 704.7,610.3 cw(c691.89,623.11) 691.89,605
  Bottom Layer w15: R2.2 v1(710,605) ; 657.25,605 cw(c657.25,647.25) 627.37,617.37 ccw(c657.25,647.25) 657.25,605 ; 657.25,605 ccw(c657.25,562.75) 627.37,592.63 cw(c657.25,562.75) 657.25,605 ; 691.89,605 cw(c691.89,586.89) 704.7,599.7 ccw(c691.89,586.89) 691.89,605 ; 691.89,605 ccw(c691.89,623.11) 704.7,610.3 cw(c691.89,623.11) 691.89,605
NetD3_1: D3.1 R3.2 | length 559.2
  Top Layer w15: D3.1 v1(1020,605) ; 972.25,605 cw(c972.25,647.25) 942.37,617.37 ccw(c972.25,647.25) 972.25,605 ; 972.25,605 ccw(c972.25,562.75) 942.37,592.63 cw(c972.25,562.75) 972.25,605 ; 1001.89,605 cw(c1001.89,586.89) 1014.7,599.7 ccw(c1001.89,586.89) 1001.89,605 ; 1001.89,605 ccw(c1001.89,623.11) 1014.7,610.3 cw(c1001.89,623.11) 1001.89,605
  Bottom Layer w15: R3.2 v1(1020,605) ; 972.25,605 cw(c972.25,647.25) 942.37,617.37 ccw(c972.25,647.25) 972.25,605 ; 972.25,605 ccw(c972.25,562.75) 942.37,592.63 cw(c972.25,562.75) 972.25,605 ; 1001.89,605 cw(c1001.89,586.89) 1014.7,599.7 ccw(c1001.89,586.89) 1001.89,605 ; 1001.89,605 ccw(c1001.89,623.11) 1014.7,610.3 cw(c1001.89,623.11) 1001.89,605
NetD4_1: D4.1 R4.2 | length 579.2
  Top Layer w15: D4.1 v1(1345,605) ; 1287.25,605 cw(c1287.25,647.25) 1257.37,617.37 ccw(c1287.25,647.25) 1287.25,605 ; 1287.25,605 ccw(c1287.25,562.75) 1257.37,592.63 cw(c1287.25,562.75) 1287.25,605 ; 1326.89,605 cw(c1326.89,586.89) 1339.7,599.7 ccw(c1326.89,586.89) 1326.89,605 ; 1326.89,605 ccw(c1326.89,623.11) 1339.7,610.3 cw(c1326.89,623.11) 1326.89,605
  Bottom Layer w15: R4.2 v1(1345,605) ; 1287.25,605 cw(c1287.25,647.25) 1257.37,617.37 ccw(c1287.25,647.25) 1287.25,605 ; 1287.25,605 ccw(c1287.25,562.75) 1257.37,592.63 cw(c1287.25,562.75) 1287.25,605 ; 1326.89,605 cw(c1326.89,586.89) 1339.7,599.7 ccw(c1326.89,586.89) 1326.89,605 ; 1326.89,605 ccw(c1326.89,623.11) 1339.7,610.3 cw(c1326.89,623.11) 1326.89,605
NetD5_1: D5.1 R5.2 | length 569.2
  Top Layer w15: D5.1 v1(1655,610) ; 1602.25,610 cw(c1602.25,652.25) 1572.37,622.37 ccw(c1602.25,652.25) 1602.25,610 ; 1602.25,610 ccw(c1602.25,567.75) 1572.37,597.63 cw(c1602.25,567.75) 1602.25,610 ; 1636.89,610 cw(c1636.89,591.89) 1649.7,604.7 ccw(c1636.89,591.89) 1636.89,610 ; 1636.89,610 ccw(c1636.89,628.11) 1649.7,615.3 cw(c1636.89,628.11) 1636.89,610
  Bottom Layer w15: R5.2 v1(1655,610) ; 1602.25,610 cw(c1602.25,652.25) 1572.37,622.37 ccw(c1602.25,652.25) 1602.25,610 ; 1602.25,610 ccw(c1602.25,567.75) 1572.37,597.63 cw(c1602.25,567.75) 1602.25,610 ; 1636.89,610 cw(c1636.89,591.89) 1649.7,604.7 ccw(c1636.89,591.89) 1636.89,610 ; 1636.89,610 ccw(c1636.89,628.11) 1649.7,615.3 cw(c1636.89,628.11) 1636.89,610
NetD6_1: D6.1 R15.2 | length 327.5
  Top Layer w20: R15.2 D6.1 ; 115,406.21 cw(c78.79,406.21) 104.39,380.61 ccw(c78.79,406.21) 115,406.21 ; 115,406.21 ccw(c151.21,406.21) 125.61,380.61 cw(c151.21,406.21) 115,406.21 ; 115,433.79 cw(c151.21,433.79) 125.61,459.39 ccw(c151.21,433.79) 115,433.79 ; 115,433.79 ccw(c78.79,433.79) 104.39,459.39 cw(c78.79,433.79) 115,433.79
NetR6_2: R6.2 U1.1 | length 493.2
  Top Layer w15: v1(500,620) U1.1 ; 500,638.11 cw(c481.89,638.11) 494.7,625.3 ccw(c481.89,638.11) 500,638.11 ; 500,638.11 ccw(c518.11,638.11) 505.3,625.3 cw(c518.11,638.11) 500,638.11 ; 500,676.31 cw(c519.91,676.31) 505.83,690.39 ccw(c519.91,676.31) 500,676.31 ; 500,676.31 ccw(c480.09,676.31) 494.17,690.39 cw(c480.09,676.31) 500,676.31
  Bottom Layer w15: R6.2 500,700 v1(500,620) ; 500,638.11 cw(c481.89,638.11) 494.7,625.3 ccw(c481.89,638.11) 500,638.11 ; 500,638.11 ccw(c518.11,638.11) 505.3,625.3 cw(c518.11,638.11) 500,638.11 ; R6.2@482.63,697.63 cw(c440.68,655.68) 500,655.68 ccw(c440.68,655.68) R6.2@482.63,697.63 ; 500,679.82 cw(c525.18,679.82) 507.37,697.63 ccw(c525.18,679.82) 500,679.82
NetR7_2: R7.2 U2.1 | length 522.2
  Top Layer w15: v1(815,610) 820,615 U2.1 ; 816.71,627.45 ccw(c824.09,623.19) v1@819.25,616.18 ; 820,676.31 cw(c839.91,676.31) 825.83,690.39 ccw(c839.91,676.31) 820,676.31 ; 820,676.31 ccw(c800.09,676.31) 814.17,690.39 cw(c800.09,676.31) 820,676.31 ; v1@809.7,615.3 ccw(c784.82,640.18) 820,640.18 cw(c784.82,640.18) v1@809.7,615.3
  Bottom Layer w15: v1(815,610) R7.2 ; 815,628.11 cw(c796.89,628.11) 809.7,615.3 ccw(c796.89,628.11) 815,628.11 ; 815,628.11 ccw(c833.11,628.11) 820.3,615.3 cw(c833.11,628.11) 815,628.11 ; 815,667.75 cw(c857.25,667.75) 827.37,697.63 ccw(c857.25,667.75) 815,667.75 ; 815,667.75 ccw(c772.75,667.75) 802.63,697.63 cw(c772.75,667.75) 815,667.75
NetR8_2: R8.2 U3.1 | length 511.1
  Top Layer w15: v1(1125,610) U3.1 ; 1125,628.11 cw(c1106.89,628.11) 1119.7,615.3 ccw(c1106.89,628.11) 1125,628.11 ; 1125,628.11 ccw(c1143.11,628.11) 1130.3,615.3 cw(c1143.11,628.11) 1125,628.11 ; 1125,676.31 cw(c1144.91,676.31) 1130.83,690.39 ccw(c1144.91,676.31) 1125,676.31 ; 1125,676.31 ccw(c1105.09,676.31) 1119.17,690.39 cw(c1105.09,676.31) 1125,676.31
  Bottom Layer w15: v1(1125,610) 1125,705 R8.2 ; 1125,628.11 cw(c1106.89,628.11) 1119.7,615.3 ccw(c1106.89,628.11) 1125,628.11 ; 1125,628.11 ccw(c1143.11,628.11) 1130.3,615.3 cw(c1143.11,628.11) 1125,628.11 ; 1125,667.75 cw(c1167.25,667.75) 1137.37,697.63 ccw(c1167.25,667.75) 1125,667.75 ; 1125,667.75 ccw(c1082.75,667.75) 1112.63,697.63 cw(c1082.75,667.75) 1125,667.75
NetR9_2: R9.2 U4.1 | length 521.1
  Top Layer w15: v1(1445,605) U4.1 ; 1445,623.11 cw(c1426.89,623.11) 1439.7,610.3 ccw(c1426.89,623.11) 1445,623.11 ; 1445,623.11 ccw(c1463.11,623.11) 1450.3,610.3 cw(c1463.11,623.11) 1445,623.11 ; 1445,676.31 cw(c1464.91,676.31) 1450.83,690.39 ccw(c1464.91,676.31) 1445,676.31 ; 1445,676.31 ccw(c1425.09,676.31) 1439.17,690.39 cw(c1425.09,676.31) 1445,676.31
  Bottom Layer w15: v1(1445,605) 1445,705 R9.2 ; 1445,623.11 cw(c1426.89,623.11) 1439.7,610.3 ccw(c1426.89,623.11) 1445,623.11 ; 1445,623.11 ccw(c1463.11,623.11) 1450.3,610.3 cw(c1463.11,623.11) 1445,623.11 ; 1445,667.75 cw(c1487.25,667.75) 1457.37,697.63 ccw(c1487.25,667.75) 1445,667.75 ; 1445,667.75 ccw(c1402.75,667.75) 1432.63,697.63 cw(c1402.75,667.75) 1445,667.75
NetR10_2: R10.2 U5.1 | length 511.1
  Top Layer w15: v1@1755,620 v1(1760,625) U5.1 ; 1760,643.11 cw(c1741.89,643.11) 1754.7,630.3 ccw(c1741.89,643.11) 1760,643.11 ; 1760,643.11 ccw(c1778.11,643.11) 1765.3,630.3 cw(c1778.11,643.11) 1760,643.11 ; 1760,686.31 cw(c1779.91,686.31) 1765.83,700.39 ccw(c1779.91,686.31) 1760,686.31 ; 1760,686.31 ccw(c1740.09,686.31) 1754.17,700.39 cw(c1740.09,686.31) 1760,686.31
  Bottom Layer w15: v1(1760,625) R10.2 ; 1760,643.11 cw(c1741.89,643.11) 1754.7,630.3 ccw(c1741.89,643.11) 1760,643.11 ; 1760,643.11 ccw(c1778.11,643.11) 1765.3,630.3 cw(c1778.11,643.11) 1760,643.11 ; 1760,682.75 cw(c1802.25,682.75) 1772.37,712.63 ccw(c1802.25,682.75) 1760,682.75 ; 1760,682.75 ccw(c1717.75,682.75) 1747.63,712.63 cw(c1717.75,682.75) 1760,682.75
NetR14_2: R14.2 U6.9 | length 225.4
  Top Layer w10: R14.2@1140.86,999.14 ccw(c1106.72,1033.28) 1155,1033.28 ccw(c1203.28,1033.28) R14.2@1169.14,999.14 ; R14.2 U6.9
RFID: C17.2 C18.2 C19.2 C21.2 U1.4 U2.4 U3.4 U4.4 U5.4 | length 2365
  Top Layer w30: U1.4 500,520 515,535 820,535 ; U2.4 820,535 ; U3.4 1125,535 ; U4.4 1445,535 ; C17.2 C21.2 C18.2 C19.2 1830,875 1840,865 1840,550 1825,535 1755,535 ; U5.4 1760,530 1755,535 ; 820,535 1125,535 ; 1125,535 1445,535 ; 1445,535 1445.31,535.31 1675.64,535.31 1675.94,535 1755,535
RX: R12.1 R13.1 U6.17 | length 1065.3
  Top Layer w10: U6.17 1125.47,1355.47 1140,1370 1155,1370
  Top Layer w20: 1155,1370 1385,1370 ; R12.1 1400,1355 1385,1370 ; R13.1 1730,1340 1700,1370 1385,1370 ; 1400,1321.21 cw(c1363.79,1321.21) 1389.39,1295.61 ccw(c1363.79,1321.21) 1400,1321.21 ; 1400,1321.21 ccw(c1436.21,1321.21) 1410.61,1295.61 cw(c1436.21,1321.21) 1400,1321.21 ; 1730,1311.21 cw(c1693.79,1311.21) 1719.39,1285.61 ccw(c1693.79,1311.21) 1730,1311.21 ; 1730,1311.21 ccw(c1766.21,1311.21) 1740.61,1285.61 cw(c1766.21,1311.21) 1730,1311.21
SCK: P1.3 U6.29 | length 1165.9
  Top Layer w10: P1.3 188.74,1036.26 ; U6.29 860.58,1188.58 827,1155 827,1003.96 782.04,959 266,959 188.74,1036.26 ; 188.74,1036.26 cw(c188.74,1076.88) 158.59,1049.66 ccw(c188.74,1076.88) 188.74,1036.26 ; 188.74,1036.26 ccw(c188.74,995.64) 158.59,1022.86 cw(c188.74,995.64) 188.74,1036.26
SDA: P1.4 U6.24 | length 1475.9
  Top Layer w10: 90.2,1063.01 ccw(c99.24,1029.25) P1.4 ; 91.75,1061.46 cw(c57.99,1070.5) P1.4 ; U6.24 866.85,1296.85 810,1240 810,1011 775,976 289,976 190,1075 103.74,1075 P1.4 ; 99.14,1070.4 cw(c65,1104.54) 65,1056.26 ccw(c65,1104.54) 99.14,1070.4 ; 99.14,1070.4 ccw(c133.28,1036.26) 85,1036.26 cw(c133.28,1036.26) 99.14,1070.4
TVDD: C4.2 C5.2 C7.2 L2.2 L4.1 U6.12 | length 3286.4
  Top Layer w10: U6.12 1233.58,1188.58 v1@1235,1190 ; 1217.44,1188.58 ccw(c1217.44,1217.56) v1@1237.93,1197.07 ; 1224.28,1188.58 cw(c1224.28,1169.28) v1@1237.93,1182.93
  Top Layer w20: L2.2 485,1225 535,1275 720,1275 735,1290 ; v1(795,1280) 795,1330 785,1340 ; 428.28,1225 cw(c428.28,1273.28) 394.14,1239.14 ccw(c428.28,1273.28) 428.28,1225 ; 428.28,1225 ccw(c428.28,1176.72) 394.14,1210.86 cw(c428.28,1176.72) 428.28,1225 ; 735,1290 cw(c779.3,1290) 749.92,1323.16 ccw(c779.3,1290) 735,1290 ; 735,1290 ccw(c690.7,1290) 720.08,1323.16 cw(c690.7,1290) 735,1290 ; 735,1290 C4.2 785,1340 ; 785,1340 cw(c785,1384.3) 751.84,1354.92 ccw(c785,1384.3) 785,1340 ; 785,1340 ccw(c785,1295.7) 751.84,1325.08 cw(c785,1295.7) 785,1340
  Top Layer w30: v1(715,1655) C5.2 C7.2 725,1445 725,1390 735,1380 ; C4.2 735,1380 ; L4.1 1725,1675 v1(1775,1625) ; 735,1380 cw(c698.04,1380) 723.12,1352.85 ccw(c698.04,1380) 735,1380 ; 735,1380 ccw(c771.96,1380) 746.88,1352.85 cw(c771.96,1380) 735,1380 ; C7.2@712.93,1447.93 cw(c683.79,1418.79) 725,1418.79 ccw(c683.79,1418.79) C7.2@712.93,1447.93
  Bottom Layer w20: v1(795,1280) 885,1190 v1(1245,1190)
  Bottom Layer w30: v1(715,1655) 1740,1655 1770,1625 v1(1775,1625)
TX1: L5.1 L6.1 U6.11 | length 814.1
  Top Layer w10: U6.11 1226.1,1168.9 1240,1155 1240,1000 1250,990 L5.1 ; L5.1@1297.32,972.32 ccw(c1254.64,929.64) 1254.64,990 ccw(c1254.64,1050.36) L5.1@1297.32,1007.68 ; L5.1@1304.39,979.39 ccw(c1278.79,953.79) 1278.79,990 ccw(c1278.79,1026.21) L5.1@1304.39,1000.61
  Top Layer w30: L6.1 L5.1 ; 1315,916.21 cw(c1278.79,916.21) 1304.39,890.61 ccw(c1278.79,916.21) 1315,916.21 ; 1315,916.21 ccw(c1351.21,916.21) 1325.61,890.61 cw(c1351.21,916.21) 1315,916.21 ; 1315,953.79 cw(c1351.21,953.79) 1325.61,979.39 ccw(c1351.21,953.79) 1315,953.79 ; 1315,953.79 ccw(c1278.79,953.79) 1304.39,979.39 cw(c1278.79,953.79) 1315,953.79
VMID: C16.1 R12.2 U6.16 | length 356
  Top Layer w10: U6.16 1155,1310 1170,1325 1295,1325 1305,1315 R12.2@1305,1290 ; R12.2@1290.86,1299.14 cw(c1280.86,1309.14) 1280.86,1295 cw(c1280.86,1260.86) R12.2@1305,1285
  Top Layer w30: C16.1 R12.2
pads on no net: P1.13 P1.14 U6.7 U6.8 U6.13 U6.19 U6.20 U6.23 U6.25 U6.26 U6.27 U6.28

## Polygon pours and split planes (outlines as drawn)
AGND on Bottom Layer "BottomLayer-No Net" (solid, remove dead copper, pour order 4): 310,1755 1820,1755 1820,1405 1825,1400 2160,1400 2160,330 2155,325 1825,325 1825,5 320,5 320,1745 310,1755
AGND on Top Layer "BottomLayer-No Net" (solid, remove dead copper, pour order 6): 318.6,1753.6 1818.6,1753.6 1818.6,1398.6 1828.6,1398.6 2158.6,1398.6 2158.6,323.6 1823.6,323.6 1823.6,3.6 318.6,3.6

## Silkscreen, mask and mechanical layers (free items; w line width, h text height)
Top Overlay:
  circle w10: c1988.19,1574.8 r157.48
  circle w10: c157.48,1574.8 r157.48
  circle w10: c1987.52,160 r157.48
  circle w10: c157.48,157.48 r157.48
Mechanical 1:
  the board outline again, w10

## Dimensions
157.48,1574.8 to 157.48,157.48 on Top Overlay
157.48,1574.8 to 1988.19,1574.8 on Top Overlay
0,0 to 2155,0 on Top Overlay
2155,1755 to 2155,0 on Top Overlay